# Altium PCB PCB.PcbDoc
Units mm, origin at the board's own origin, x right, y up, seen from the top; angles counter-clockwise.
Board outline 45.34 x 54.67 mm, 2 copper layers (Top Layer, Bottom Layer); 46 components, 49 nets, 176 pads, 748 vias.
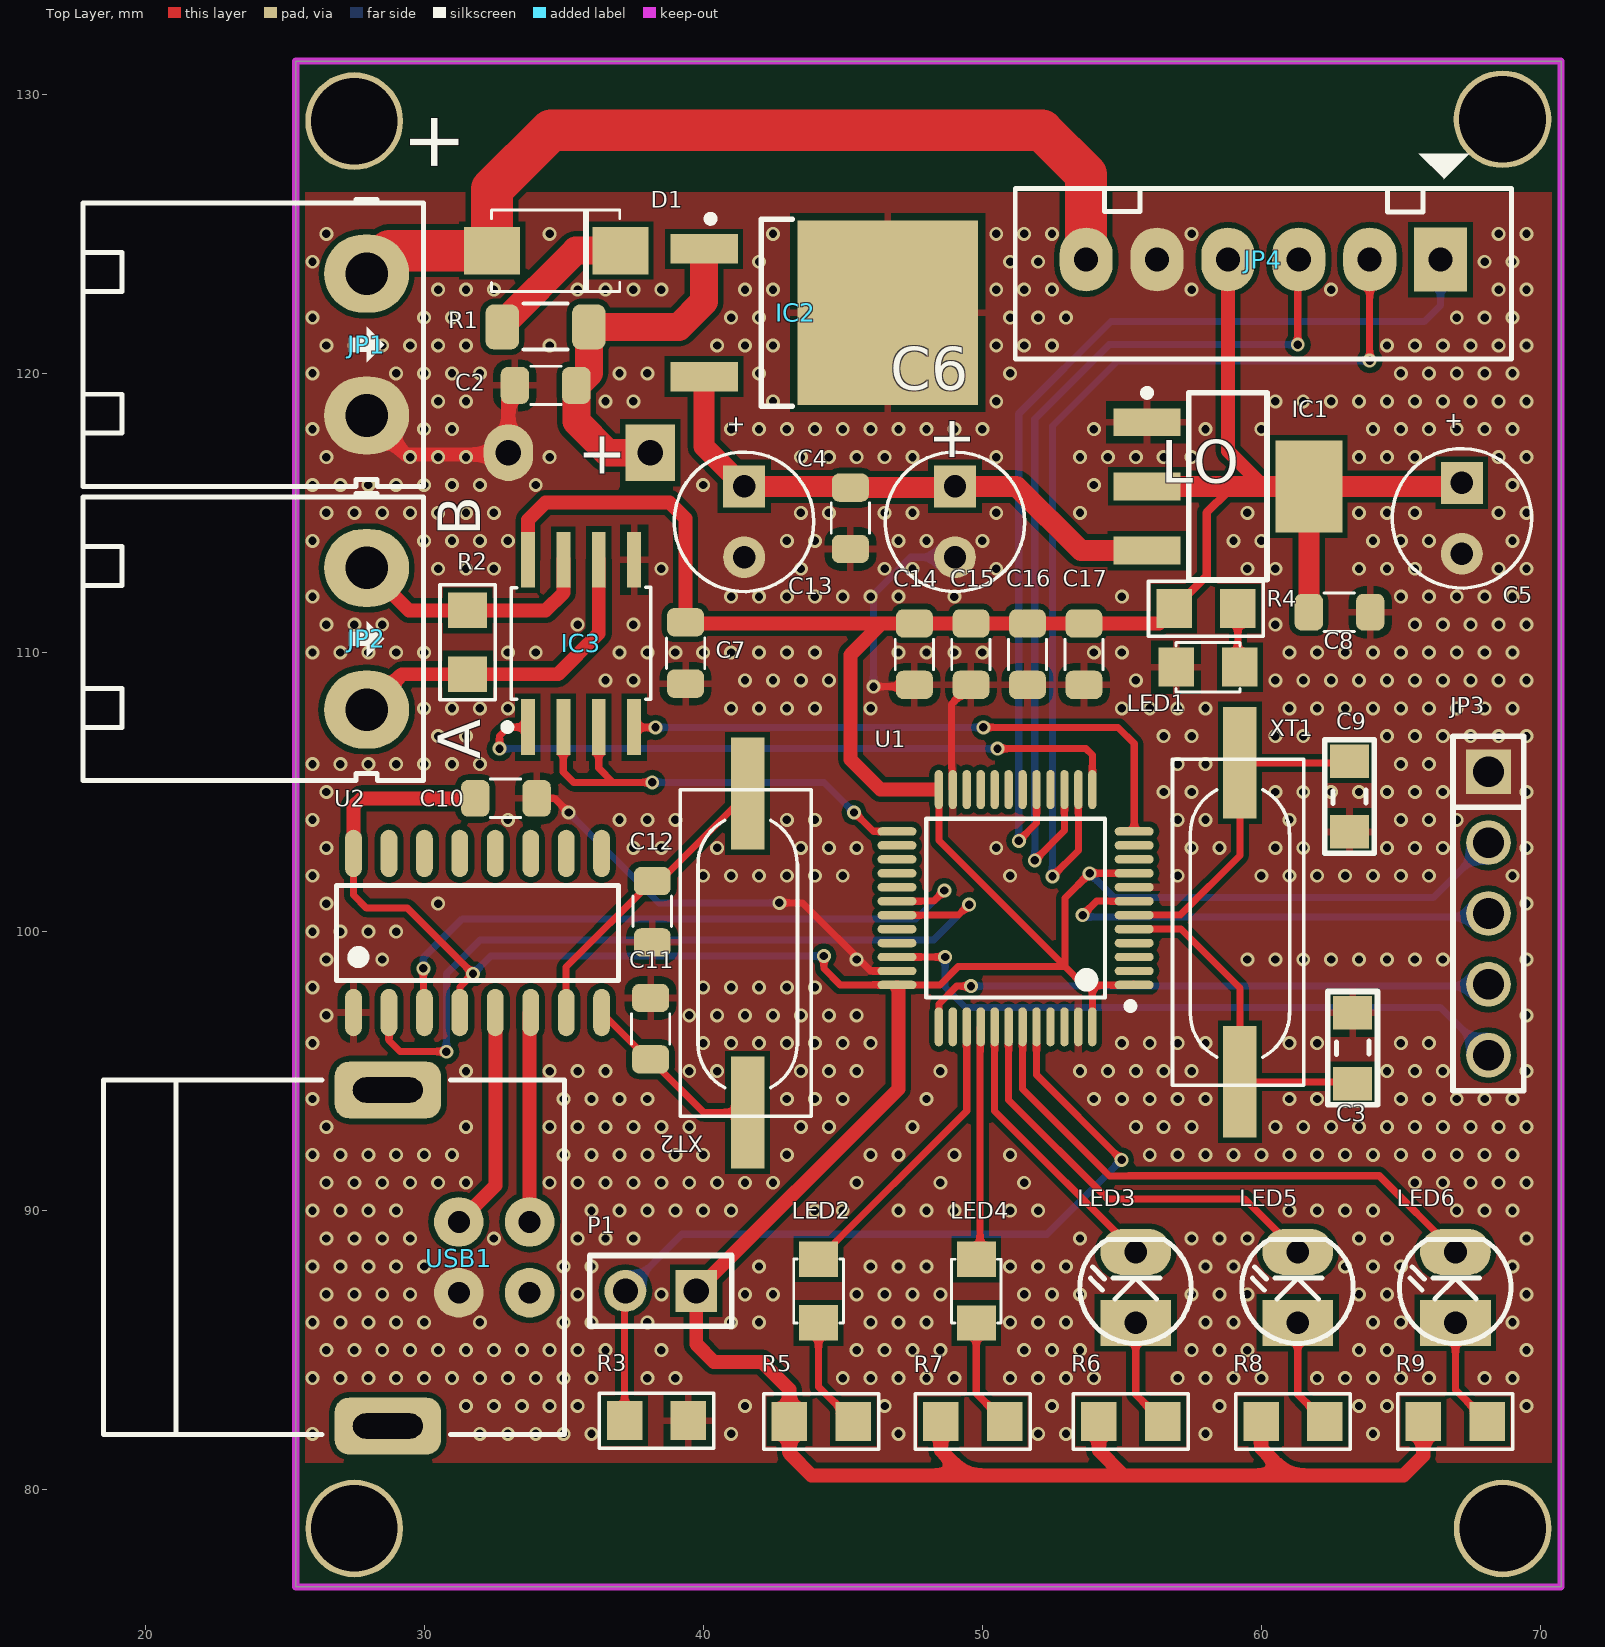
[diagram p0: Top Layer view]
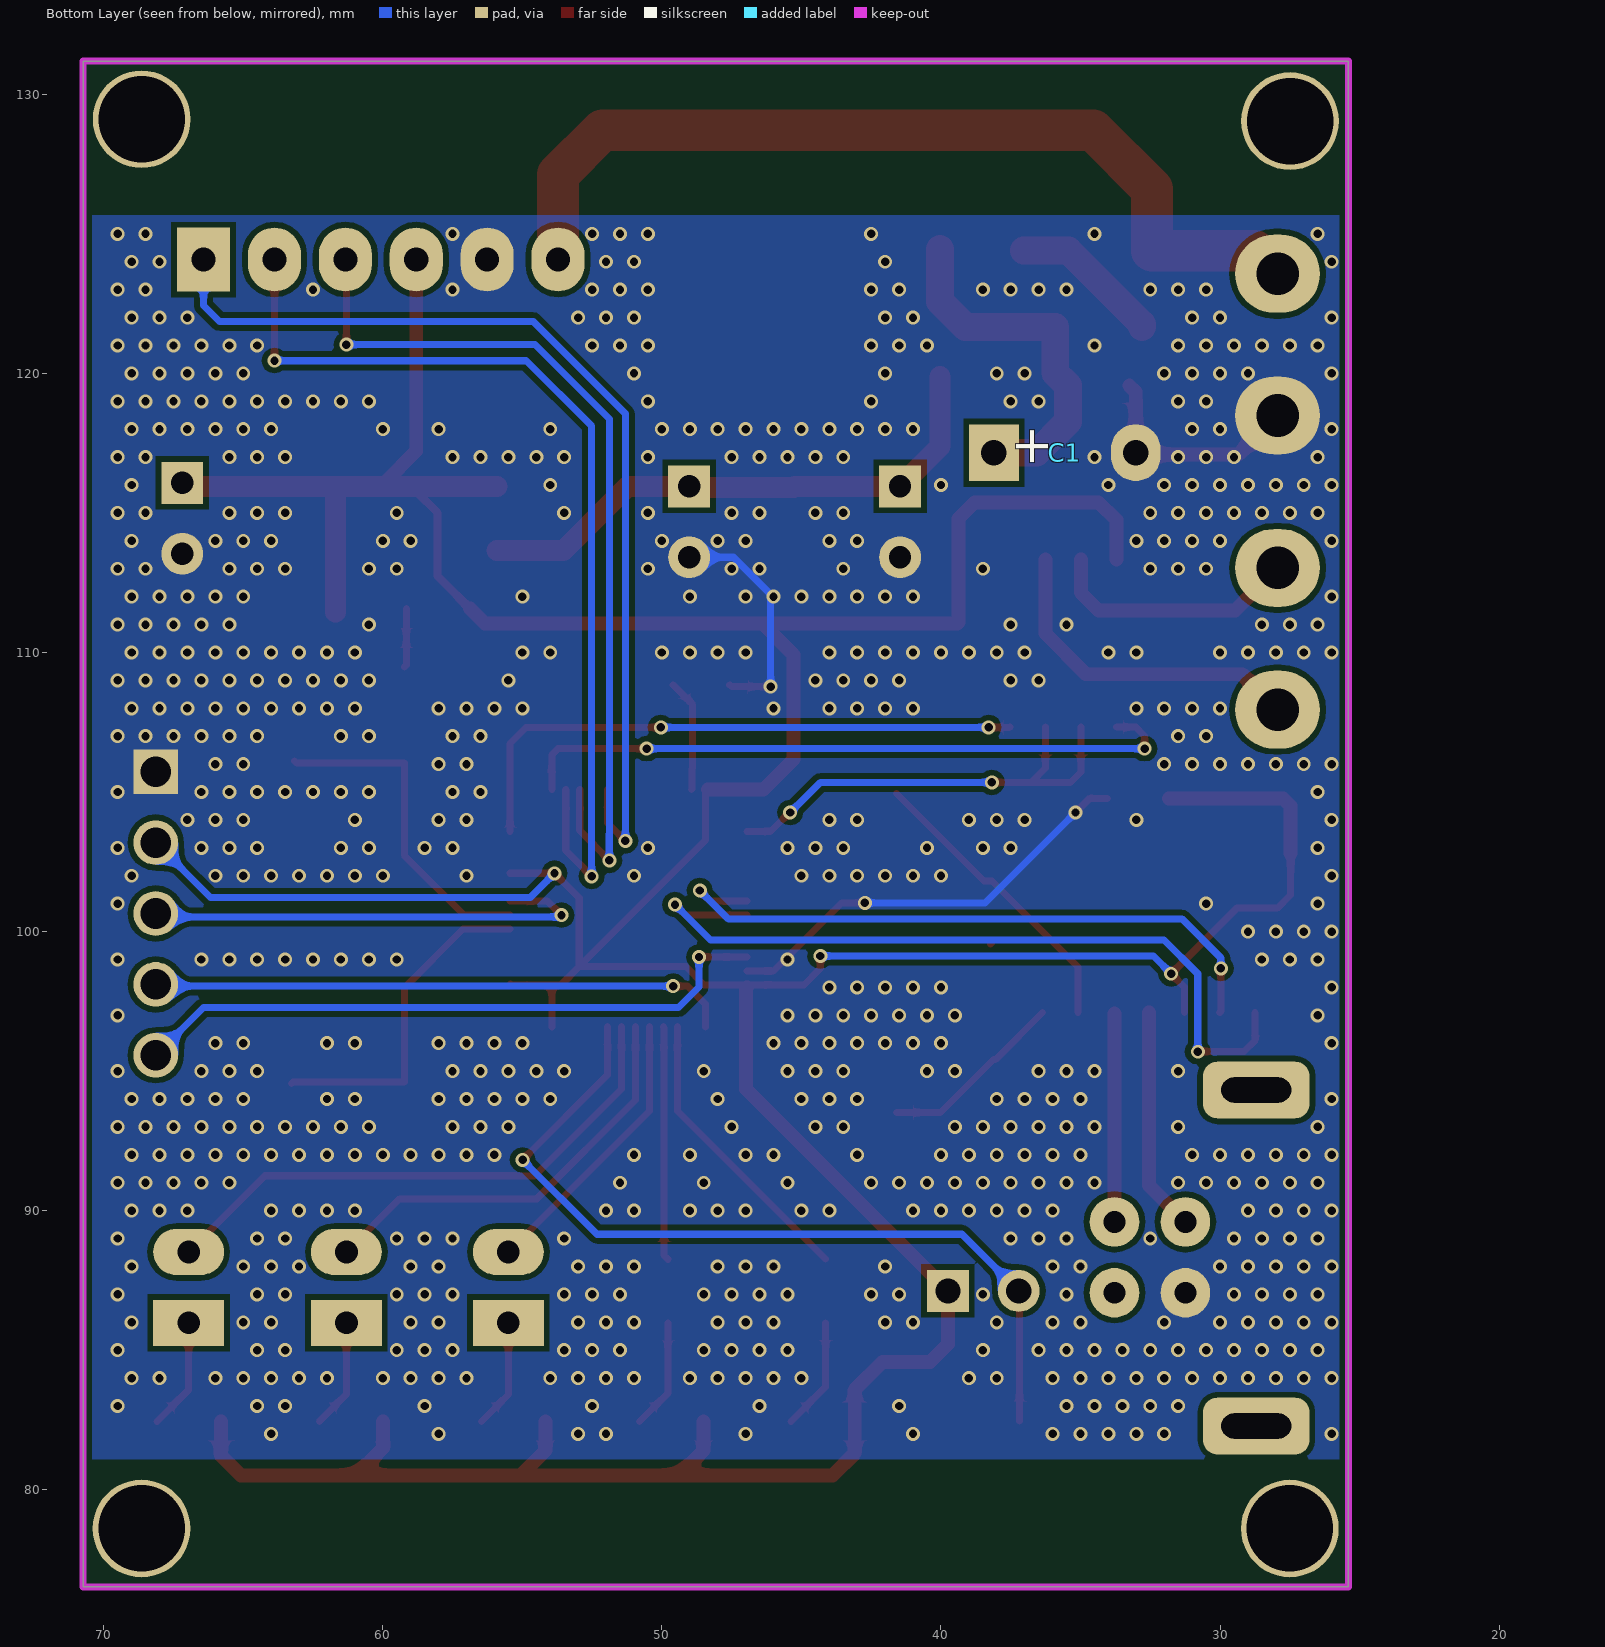
[diagram p1: Bottom Layer view, seen from below]
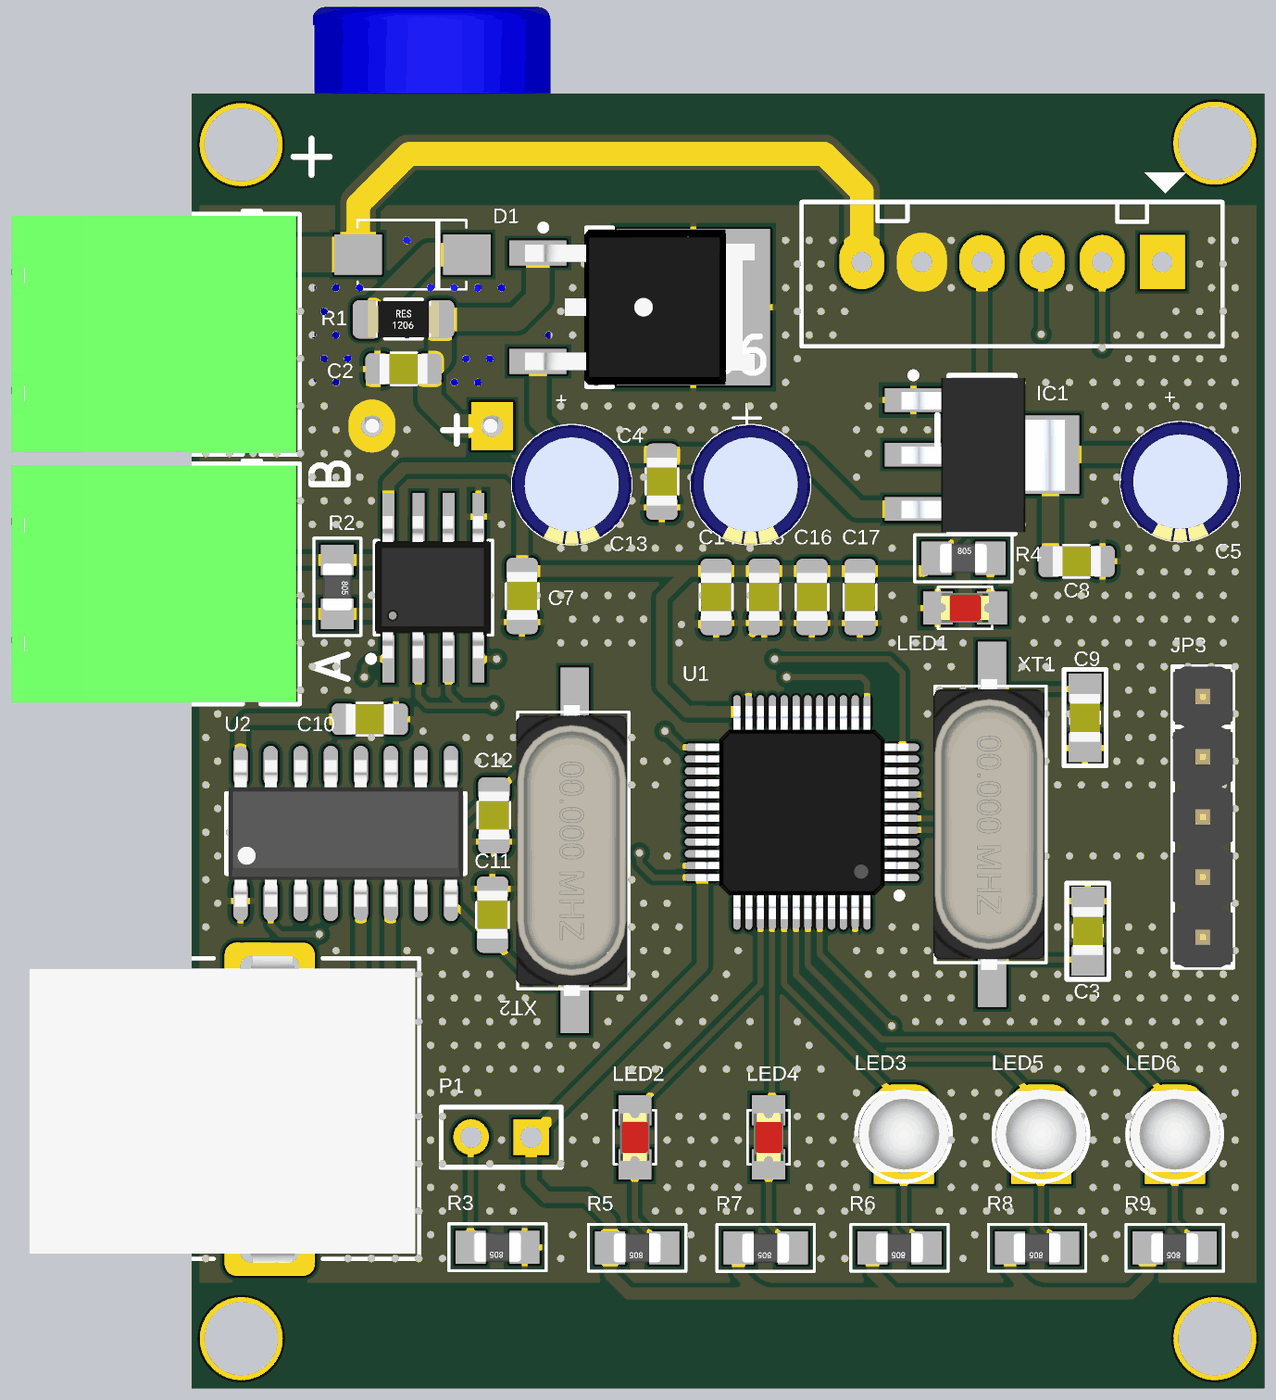
[diagram p2: 3D render of the assembled board from above, using the file's embedded part models]

## Layer stack, top to bottom
Top Solder: solder mask 0.0102, Solder Resist, Dk 3.5
Top Layer: signal copper 0.0356
Dielectric 1: dielectric 0.32, FR-4, Dk 4.8
Bottom Layer: signal copper 0.0356
Bottom Solder: solder mask 0.0102, Solder Resist, Dk 3.5

## Board outline
25.4,76.517 25.4,131.191 70.739,131.191 70.739,76.517

## Design rules (kind name [scope] priority, off if disabled: settings)
Clearance [All] p1: gap=0.2 ignorepadtopadclearanceinfootprint=FALSE
PolygonConnect [All] p1: thpad.connectstyle=Direct thpad.reliefconductorwidth=0.254 thpad.reliefentries=4 thpad.polygonreliefangle="90 Angle" thpad.airgapwidth=0.254 smdpad.connectstyle=Relief smdpad.reliefconductorwidth=0.254 smdpad.reliefentries=4 smdpad.polygonreliefangle="90 Angle" smdpad.airgapwidth=0.254 via.connectstyle=Direct via.reliefconductorwidth=0.254 via.reliefentries=4 via.polygonreliefangle="90 Angle" via.airgapwidth=0.254
RoutingVias [All] p1: holewidth=0.3 width=0.5 viastyle="Through Hole" minholewidth=0.3 minwidth=0.5 maxholewidth=0.3 maxwidth=0.6
SolderMaskExpansion [All] p1: expansion=0.102
Width [All] p1: maxlimit=3 minlimit=0.127 preferedwidth=0.254
30 further rules are at their usual default settings.

## Components (designator, comment, footprint, x,y, rotation, side; value= is the part's Value field where it differs from the comment)
C1 "470uF/25V" "CP_1000UF/25V_NAM - cao" 35.56,117.157 r90 bottom value=470uF
C2 "10uF" C-0805 34.353,119.57 r0 top value=103
C3 "22pF" CAP_0805 63.246,95.822 r90 top value=33p
C4 "10uF" C-0805 45.276,114.808 r90 top value=103
C5 "220uF/16V" CA-ALU-5L 67.183,114.808 r270 top value=100uF/35V/50V
C6 "220uF/16V" CA-ALU-5L 49.022,114.681 r270 top value=100uF/35V/50V
C7 "220uF/16V" CA-ALU-5L 41.465,114.681 r270 top value=100uF/35V/50V
C8 "10uF" C-0805 62.801,111.442 r180 top value=103
C9 "22pF" CAP_0805 63.182,104.838 r270 top value=33p
C10 "100nF" C-0805 32.931,104.775 r180 top
C11 "22pF" C-0805 38.115,96.52 r270 top
C12 "22pF" C-0805 38.175,100.711 r90 top
C13 "100nF" C-0805 39.37,109.982 r270 top
C14 "100nF" C-0805 47.568,109.939 r270 top value=103
C15 "100nF" C-0805 49.594,109.939 r270 top value=103
C16 "100nF" C-0805 51.619,109.939 r270 top value=103
C17 "100nF" C-0805 53.645,109.939 r270 top value=103
D1 "M7" SMA11 34.734,124.396 r0 top value=1N4007
IC1 "LM1117" SOT223-4N 58.801,115.951 r0 top value=LM317
IC2 "LM7805" "TO-252 7805" 43.561,122.174 r0 top
IC3 "MAX3485" SOIC-8 35.622,110.325 r0 top
JP1 "JP2" KF2-5.08T 27.94,123.571 r270 top value="Connector 2"
JP2 "JP2" KF2-5.08T 27.94,113.03 r270 top value="Connector 2"
JP3 "JP5" JP5-D1T 68.135,105.727 r270 top value="Connector 5"
JP4 "JP6" CON6 66.421,124.079 r180 top value="Connector 6"
LED1 "LED" LED-0805-Red 59.229,109.474 r180 top value="LED 3 ly Single Colour"
LED2 "LED" LED-0805-Red 44.133,85.979 r90 top value="LED 3 ly Single Colour"
LED3 "LED" LED-3 55.499,85.979 r90 top value="LED 3 ly Single Colour"
LED4 "LED" LED-0805-Red 49.784,85.974 r90 top value="LED 3 ly Single Colour"
LED5 "LED" LED-3 61.303,85.979 r90 top value="LED 3 ly Single Colour"
LED6 "LED" LED-3 66.954,85.979 r90 top value="LED 3 ly Single Colour"
P1 "Header 2" HDR1X2 39.751,87.122 r180 top
R1 "10R" R-1206 34.353,121.666 r0 top value="R1/4W - 1K"
R2 "120R" R-0805 31.559,110.363 r270 top value="R1/4W - 1K"
R3 "10k" R-0805 38.327,82.474 r180 top value="R1/4W - 1K"
R4 "1K" R-0805 58.014,111.569 r0 top value="R1/4W - 1K"
R5 "1K" R-0805 44.232,82.448 r180 top value="R1/4W - 1K"
R6 "1K" R-0805 55.317,82.448 r180 top value="R1/4W - 1K"
R7 "1K" R-0805 49.657,82.443 r180 top value="R1/4W - 1K"
R8 "1K" R-0805 61.131,82.448 r180 top value="R1/4W - 1K"
R9 "1K" R-0805 66.946,82.448 r180 top value="R1/4W - 1K"
U1 "STM32F103C8T6" LQFP48_L 51.194,100.838 r90 top
U2 "CH340G" SOIC-16 31.915,99.949 r90 top
USB1 "USB-B" USB-B 31.242,88.303 r270 top
XT1 "8Mhz" XTAL-RU49/4 59.229,95.377 r90 top value=12Mhz
XT2 "12Mhz" XTAL-RU49/4 41.593,94.279 r90 top

## Footprints (in the part's own frame and the unit in brackets; to place one, negate y for a bottom-side part, rotate by r counter-clockwise, add the part's x,y. Pads: shape width x height; smd on the part's side, far side on the other; paste and mask are expansions set on the pad)
C-0805 [mil] "Compoment SMD 80x50mil"
  rrect50% 40x52 smd: 1(-43.31,0) 2(43.31,0)
  silkscreen extent -21,-27 22,27, body extent -40,-25 40,25, height 24
CA-ALU-5L [mm] "Polarized capacitors, Aluminum Electrolytic Capacitors, 2-Leads, Body 5x11x2x0.5"
  rect 1.5x1.5 hole 0.8: 1(-1.27,0)
  round 1.5 hole 0.8: 2(1.27,0)
  silkscreen extent -2.5,-2.5 2.5,2.5, body extent -2.54,-2.54 2.54,2.54, height 13.9
CAP_0805 [mm]
  rect 1.2x1.4 smd: 1(-1.27,-0.025) 2(1.27,-0.025)
  silkscreen extent -2.03,-0.91 2.03,0.86, body extent -1.01,-0.66 1.01,0.61, height 0.61
CON6 [mil] "CON6"
  rect 75x90 hole 34: 1(0,0)
  oval 75x90 hole 34: 2(100,0) 3(200,0) 4(300,0) 5(400,0) 6(500,0)
  silkscreen extent -100,-150 600,140
"CP_1000UF/25V_NAM - cao" [mil]
  rect 80x70 hole 36: 1(0,100)
  oval 80x70 hole 36: 2(0,-100)
  body extent -12,-199 697,197, height 458
HDR1X2 [mm] "Connector; Header; 2 Position"
  rect 1.5x1.5 hole 0.9: 1(0,0)
  round 1.5 hole 0.9: 2(2.54,0)
  silkscreen extent -1.27,-1.27 3.81,1.27, body extent -1.27,-1.27 3.81,1.27, height 7
JP5-D1T [mm] "5 pins, 1 row, straight, gold plating"
  rect 1.6x1.6 hole 1.1: 1(0,0)
  round 1.6 hole 1.1: 2(2.54,0) 3(5.08,0) 4(7.62,0) 5(10.16,0)
  silkscreen extent -1.27,-1.27 11.43,1.27, body extent -1.27,-1.27 11.43,1.27, height 8.54
KF2-5.08T [mil] "Header 2, 2 pin, hight 300mil, Pin to Pin 200, Colour Green"
  oval 110x120 hole 60: 1(0,0) 2(200,0)
  silkscreen extent -105,-400 300,80, body extent -97,-399 297,73, height 334
LED-3 [mil] "LED 2 PIN, 3ly Only colour"
  rect 65x100 hole 32: 1(0,0)
  oval 65x100 hole 32: 2(100,0)
  silkscreen extent -29,-78 118,79, body extent -13,-75 125,75, height 217
LED-0805-Red [mil]
  rect 50x55 smd: 1(0,0) 2(90,0)
  silkscreen extent 0,-35 90,35, body extent 5,-25 85,25, height 43
LQFP48_L [mm]
  oval 0.3x1.4 smd: 1(-2.75,-4.25) 2(-2.25,-4.25) 3(-1.75,-4.25) 4(-1.25,-4.25) 5(-0.75,-4.25) 6(-0.25,-4.25) 7(0.25,-4.25) 8(0.75,-4.25) 9(1.25,-4.25) 10(1.75,-4.25) 11(2.25,-4.25) 12(2.75,-4.25) 25(2.75,4.25) 26(2.25,4.25) 27(1.75,4.25) 28(1.25,4.25) 29(0.75,4.25) 30(0.25,4.25) 31(-0.25,4.25) 32(-0.75,4.25) 33(-1.25,4.25) 34(-1.75,4.25) 35(-2.25,4.25) 36(-2.75,4.25)
  oval 1.4x0.3 smd: 13(4.25,-2.75) 14(4.25,-2.25) 15(4.25,-1.75) 16(4.25,-1.25) 17(4.25,-0.75) 18(4.25,-0.25) 19(4.25,0.25) 20(4.25,0.75) 21(4.25,1.25) 22(4.25,1.75) 23(4.25,2.25) 24(4.25,2.75) 37(-4.25,2.75) 38(-4.25,2.25) 39(-4.25,1.75) 40(-4.25,1.25) 41(-4.25,0.75) 42(-4.25,0.25) 43(-4.25,-0.25) 44(-4.25,-0.75) 45(-4.25,-1.25) 46(-4.25,-1.75) 47(-4.25,-2.25) 48(-4.25,-2.75)
  silkscreen extent -3.63,-4.24 3.2,3.2, body extent -4.5,-4.5 4.5,4.5, height 1.5
R-0805 [mil] "Compoment SMD 80x50mil"
  rect 50x55 smd: 1(-45,0) 2(45,0)
  silkscreen extent -81,-39 81,39, body extent -39,-25 39,25, height 31
R-1206 [mm] "Compoment SMD 120x60mil"
  rrect50% 1.2x1.62 smd: 1(-1.55,0) 2(1.55,0)
  silkscreen extent -0.79,-0.81 0.79,0.84, body extent -1.5,-0.77 1.51,0.78, height 0.55
SMA11 [mm] "SMAJ5.0A/CA,SMAJ24CA..."
  rect 2x1.7 smd: 1(-2.3,0) 2(2.3,0)
  silkscreen extent -2.33,-1.46 2.27,1.46, body extent -2.54,-1.46 2.54,1.46, height 2.62
SOIC-8 [mm]
  rect 0.5x2 smd: 1(-1.905,-3) 2(-0.635,-3) 3(0.635,-3) 4(1.905,-3) 5(1.905,3) 6(0.635,3) 7(-0.635,3) 8(-1.905,3)
  silkscreen extent -2.76,-3.12 2.5,2.01, body extent -2.48,-2.97 2.42,3.03, height 1.7
SOIC-16 [mm]
  oval 1.7x0.6 smd: 1(-2.85,4.445) 2(-2.85,3.175) 3(-2.85,1.905) 4(-2.85,0.635) 5(-2.85,-0.635) 6(-2.85,-1.905) 7(-2.85,-3.175) 8(-2.85,-4.445) 9(2.85,-4.445) 10(2.85,-3.175) 11(2.85,-1.905) 12(2.85,-0.635) 13(2.85,0.635) 14(2.85,1.905) 15(2.85,3.175) 16(2.85,4.445)
  silkscreen extent -1.7,-5.05 1.7,5.05, body extent -3.1,-4.95 3.1,4.95, height 1.7
SOT223-4N [mm] "SOT223, 4-Leads, Body 6.5x3.5mm, Pitch 2.3mm, Lead Span 7mm, IPC Medium Density"
  rect 2.4x1 smd: 1(-2.9,2.3) 2(-2.9,0) 3(-2.9,-2.3)
  rect 2.4x3.3 smd: 4(2.9,0)
  silkscreen extent -3.02,-3.35 1.4,3.47, body extent -3.39,-3.27 3.5,3.23, height 1.72
"TO-252 7805" [mil]
  rect 95x41.34 smd: 1(-138.92,90.16) 3(-138.92,-90.16)
  rect 255x260 smd: 2(120,0)
  silkscreen extent -135,-132 -15,137, body extent -160,-130 221,130, height 91
USB-B [mil]
  rrect50% 80x150 hole 35.43 slot 98.43 at 90 deg: 0(-237.01,-100) 0(237.01,-100)
  round 70 hole 31: 1(49,100) 2(-51,100) 3(-51,0) 4(49,0)
  silkscreen extent -251,-501 249,149, body extent -290,-500 296,142, height 447
XTAL-RU49/4 [mm]
  rect 4x1.2 smd: 1(-0.762,0) 2(10.668,0)
  silkscreen extent -0.89,-2.29 10.8,2.41, body extent -1.2,-2.22 11.1,2.48, height 4.3

## Part data
C1: library part CP4, "470uF/35V", Manufacturer="Würth Elektronik", Part number=860020575014, Category=CAPACITOR, User_Description="CAP ALUM 470UF 20% 35V RADIAL"
C2 C4 C8 C14 C15 C16 C17: library part C, "Cap SMD"
C3 C9: library part CapSMD, "Capacitor", LatestRevisionDate=17-Jul-2002, LatestRevisionNote="Re-released for DXP Platform.", PackageReference=RAD-0.3, Published=8-Jun-2000, Publisher="Altium Limited"
C5 C6 C7: library part CP3, "Cap 100uF/35V - 470uF/16V", Description 1="1000uF/6,3V - 470uF/16V - 330uF - 25V", Description 2="220uF/35V - 100uF/50V - 63V - 4,7uF/200V", Description 3="22uF => 33uF100V - 3,3uF => 4,7uF/250V", Description 4="2,2uF =>3,3uF/350 - 2,2uF/400V - 1uF/450V"
C10 C13: library part C, "Cap SMD", Manufacturer="Samsung Electro-Mechanics", Package=0805, Part number=CL21B104KBCNNWC, Category=CAPACITOR, User_Description="CAP CER 0.1UF 50V X7R 0805"
C11 C12: library part C, "Cap SMD", Manufacturer="Samsung Electro-Mechanics", Package=0805, Part number=CL21C220JBANFNC, Category=CAPACITOR, User_Description="CAP CER 22PF 50V C0G/NP0 0805"
D1: library part D1A, "Diode 1A"
IC1: "3v3"
IC2: library part LM78xx, "On ap +, from + 5 to + 24VDC"
IC3: library part MAX3362EKA+T, "IC TRANSCEIVER HALF 1/1 SOT23-8", Manufacturer="Maxim Integrated", Package=SOT-23-8, Category="Interface - Drivers", Part number=MAX3362EKA+T, User_Description="IC TRANSCEIVER HALF 1/1 SOT23-8"
JP1 JP2: library part Con2, "Connector 2"
JP3: library part Con5, "Connector 5"
JP4: library part Con6, "Connector 6"
LED1 LED2 LED3 LED4 LED5 LED6: "LED Single colour Green and Red"
P1: "Header, 2-Pin", LatestRevisionDate=17-Jul-2002, LatestRevisionNote="Re-released for DXP Platform.", Publisher="Altium Limited"
R1 R2 R3 R4 R5 R6 R7 R8 R9: library part RES, "Resistor 1/4W"
U2: "USB to UART Interface", Manufacturer=WCH, Package=SOIC-16, Category="IC UART Interface", Part number=CH340G, User_Description="USB to UART Interface"
USB1: "CONN USB 2.0 RT ANGLE TYPE B", Manufacturer="Stewart Connector", Package="Through Hole", Part number=SS-52300-001, Category="Connectors, Interconnects", User_Description="CONN USB 2.0 RT ANGLE TYPE B"
XT1 XT2: library part XT2, "CRYSTAL 12.0000MHZ 18PF SMD", Manufacturer="IQD Frequency Products", Package=HC-49/US, Part number=LFXTAL036356REEL, Category=Crystals, User_Description="CRYSTAL 12.0000MHZ 18PF SMD"

## Free pads (board coordinates)
  round 3.5 hole 3.1: 2(27.492,129.041) 3(68.64,129.105) 4(27.497,78.613) 5(68.645,78.613)

## Via types
v1: diameter 0.5, hole 0.3, Top Layer to Bottom Layer, tented both sides, 748 vias

## Nets (pads, with @x,y where several pads share a name; then routed paths per layer and width w, separated by ;. In a path a pad name is that pad's centre, name@x,y a point inside that pad or via, vN(x,y) a via of type N, cw(c..) or ccw(c..) an arc to the next point about the centre after c; other vN are vias at no path point)
5V: USB1.1
485A: IC3.6 JP2.2 R2.2 | length 12.1
  Top Layer w0.5: JP2.2 29.21,109.22 R2.2 34.798,109.22 36.257,110.679 IC3.6
485B: IC3.7 JP2.1 R2.1 | length 9.1
  Top Layer w0.5: JP2.1 29.464,111.506 R2.1 34.353,111.506 34.987,112.14 IC3.7
+3.3V: C5.1 C8.2 C10.2 C13.1 C14.1 C15.1 C16.1 C17.1 IC1.2 IC1.4 IC3.8 JP3.2 JP4.4 P1.1 R4.1 R5.2 R6.2 R7.2 R8.2 R9.2 U1.1 U1.9 U1.24 U1.36 U1.48 U2.4 U2.16 | length 191.4
  Top Layer w0.254: U2.16 27.47,101.308 27.94,100.838 29.4,100.838 v1(31.75,98.489) 31.28,98.019 U2.4 ; v1(44.323,99.123) 44.323,98.675 44.91,98.088 U1.36 48.485,98.088 49.14,98.742 52.959,98.742 ; U1.24 48.444,103.258 52.959,98.742 ; U1.48 53.944,98.079 ; U1.1 55.421,98.111 55.388,98.079 53.944,98.079 ; U1.9 v1(53.848,102.088) 52.959,101.199 52.959,98.742 ; 52.959,98.742 53.623,98.079 53.944,98.079
  Top Layer w0.3: R4.1 58.039,112.738 58.039,115.008 58.801,115.77 58.801,115.951
  Top Layer w0.5: U2.16 27.47,104.496 27.749,104.775 C10.2 ; IC3.8 33.717,114.743 34.353,115.379 38.798,115.379 39.37,114.808 C13.1 39.413,111.039 46.396,111.039 ; U1.36@46.944,97.988 46.99,97.942 46.99,94.361 P1.1 39.751,85.217 40.386,84.582 42.1,84.582 43.089,83.594 R5.2 43.089,81.308 43.878,80.518 49.403,80.518 ; U1.24@48.344,105.088 47.095,105.088 47.089,105.094 46.51,105.094 46.504,105.088 46.355,105.088 45.276,106.167 45.276,109.918 46.396,111.039 ; R7.2 48.514,81.407 49.403,80.518 ; R6.2 54.174,81.399 54.991,80.581 54.991,80.518 ; R4.1 56.34,111.039 C17.1 C16.1 C15.1 C14.1 46.396,111.039 ; JP4.4 58.801,117.221 59.944,116.078 59.944,115.951 ; R8.2 59.988,81.49 60.96,80.518 ; R9.2 65.803,81.233 65.087,80.518 60.96,80.518 ; 49.403,80.518 54.991,80.518 ; 54.991,80.518 60.96,80.518
  Top Layer w0.75: IC1.2 58.801,115.951 59.944,115.951 IC1.4 ; C8.2 IC1.4 ; C5.1 67.056,115.951 IC1.4
  Bottom Layer w0.254: v1(31.75,98.489) 32.385,99.123 v1(44.323,99.123) ; v1(53.848,102.088) 54.717,101.219 66.167,101.219 JP3.2
+5V: C4.2 C6.1 C7.1 IC1.3 IC2.3 | length 20
  Top Layer w0.75: IC2.3 40.032,117.384 C7.1 45.233,115.951 C4.2 48.979,115.908 C6.1 51.23,115.951 53.53,113.651 IC1.3
+12: D1.1 JP1.1 JP4.6 | length 32.9
  Top Layer w1.5: JP1.1 28.765,124.396 D1.1 32.434,126.605 34.544,128.714 52.133,128.714 53.721,127.127 JP4.6
BOOT0: P1.2 R3.2 U1.44 | length 30.4
  Top Layer w0.254: R3.2 P1.2@37.184,87.095 ; U1.44 51.944,94.868 v1(54.991,91.821)
  Top Layer w0.5: P1.2@37.184,87.095 P1.2
  Bottom Layer w0.254: P1.2 39.243,89.154 52.324,89.154 v1(54.991,91.821)
D+: U2.5 USB1.3 | length 8
  Top Layer w0.5: USB1.3 32.55,90.907 U2.5
D-: U2.6 USB1.2 | length 7.5
  Top Layer w0.4: U2.6@33.782,97.061 U2.6
  Top Layer w0.5: USB1.2 U2.6@33.782,97.061
DE/RE: IC3.2 IC3.3 U1.25 | length 16.6
  Top Layer w0.254: IC3.2 34.987,105.719 35.359,105.346 36.767,105.346 ; IC3.3 36.257,105.856 36.767,105.346 ; v1(38.175,105.346) 36.767,105.346 ; v1(45.402,104.267) 45.427,104.267 46.106,103.588 U1.25
  Bottom Layer w0.254: v1(38.175,105.346) 44.323,105.346 v1(45.402,104.267)
GND: C1.2 C2.1 C3.2 C4.1 C5.2 C6.2 C7.2 C8.1 C9.2 C10.1 C11.1 C12.1 C13.2 C14.2 C15.2 C16.2 C17.2 IC1.1 IC2.2 IC3.5 JP1.2 JP3.1 JP4.5 LED1.2 R3.1 U1.8 U1.23 U1.35 U1.47 U2.1 USB1.4 | length 36.1
  Top Layer w0.254: C10.1 34.671,104.775 v1(35.179,104.267) ; C12.1 C12.1@38.227,99.559 ; v1(42.728,101.028) 43.561,101.028 46.002,98.588 U1.35 ; v1(46.101,108.775) 47.504,108.775 C14.2 ; U1.23 48.921,105.111 48.921,105.836 48.895,105.861 48.895,108.14 C15.2
  Top Layer w0.5: JP1.2 29.337,117.094 32.956,117.094 C1.2 33.02,119.337 C2.1
  Bottom Layer w0.254: v1(35.179,104.267) 38.417,101.028 v1(42.728,101.028) ; v1(46.101,108.775) 46.101,112.078 47.434,113.411 C6.2
  other v1: 26,82 32,82 33,82 34,82 35,82 36,82 41,82 47,82 52,82 53,82 58,82 64,82 31.5,83 32.5,83 33.5,83 34.5,83 35.5,83 41.5,83 46.5,83 52.5,83 58.5,83 63.5,83 64.5,83 69.5,83 26,84 27,84 28,84 29,84 30,84 31,84 32,84 33,84 34,84 35,84 36,84 38,84 39,84 45,84 46,84 47,84 48,84 49,84 51,84 52,84 53,84 54,84 57,84 58,84 59,84 60,84 62,84 63,84 64,84 65,84 66,84 68,84 69,84 26.5,85 27.5,85 28.5,85 29.5,85 30.5,85 31.5,85 32.5,85 33.5,85 34.5,85 35.5,85 36.5,85 38.5,85 45.5,85 46.5,85 47.5,85 48.5,85 51.5,85 52.5,85 53.5,85 57.5,85 58.5,85 59.5,85 63.5,85 64.5,85 69.5,85 26,86 27,86 28,86 29,86 30,86 32,86 35,86 36,86 38,86 41,86 42,86 46,86 47,86 48,86 51,86 52,86 53,86 58,86 59,86 64,86 65,86 69,86 26.5,87 27.5,87 28.5,87 29.5,87 35.5,87 38.5,87 41.5,87 42.5,87 45.5,87 46.5,87 47.5,87 48.5,87 51.5,87 52.5,87 53.5,87 57.5,87 58.5,87 59.5,87 63.5,87 64.5,87 69.5,87 26,88 27,88 28,88 29,88 30,88 35,88 36,88 42,88 46,88 47,88 48,88 51,88 52,88 53,88 58,88 59,88 63,88 64,88 65,88 69,88 26.5,89 27.5,89 28.5,89 29.5,89 32.5,89 35.5,89 36.5,89 37.5,89 53.5,89 57.5,89 58.5,89 59.5,89 63.5,89 64.5,89 69.5,89 26,90 27,90 28,90 29,90 36,90 37,90 38,90 39,90 40,90 41,90 44,90 45,90 47,90 48,90 49,90 51,90 52,90 61,90 62,90 63,90 64,90 67,90 68,90 69,90 26.5,91 27.5,91 28.5,91 29.5,91 30.5,91 31.5,91 34.5,91 35.5,91 36.5,91 37.5,91 38.5,91 39.5,91 40.5,91 41.5,91 42.5,91 45.5,91 48.5,91 51.5,91 65.5,91 66.5,91 67.5,91 68.5,91 69.5,91 26,92 27,92 28,92 29,92 30,92 31,92 35,92 36,92 37,92 38,92 39,92 40,92 43,92 46,92 47,92 49,92 51,92 56,92 57,92 58,92 59,92 60,92 61,92 62,92 63,92 64,92 65,92 66,92 67,92 68,92 69,92 26.5,93 31.5,93 34.5,93 35.5,93 36.5,93 37.5,93 38.5,93 39.5,93 43.5,93 44.5,93 47.5,93 55.5,93 56.5,93 57.5,93 60.5,93 61.5,93 62.5,93 63.5,93 64.5,93 65.5,93 66.5,93 67.5,93 68.5,93 69.5,93 26,94 35,94 36,94 37,94 38,94 43,94 44,94 45,94 48,94 54,94 55,94 56,94 57,94 58,94 61,94 62,94 65,94 66,94 67,94 68,94 69,94 31.5,95 34.5,95 35.5,95 36.5,95 39.5,95 40.5,95 43.5,95 44.5,95 45.5,95 48.5,95 53.5,95 54.5,95 55.5,95 56.5,95 57.5,95 64.5,95 65.5,95 66.5,95 69.5,95 26,96 40,96 41,96 42,96 43,96 44,96 45,96 46,96 55,96 56,96 57,96 58,96 61,96 62,96 65,96 66,96 26.5,97 39.5,97 40.5,97 41.5,97 42.5,97 43.5,97 44.5,97 45.5,97 69.5,97 26,98 40,98 41,98 42,98 43,98 44,98 26.5,99 27.5,99 28.5,99 45.5,99 59.5,99 60.5,99 61.5,99 62.5,99 63.5,99 64.5,99 65.5,99 66.5,99 69.5,99 26,100 27,100 28,100 29,100 26.5,101 30.5,101 69.5,101 26,102 40,102 41,102 42,102 43,102 44,102 45,102 51,102 57,102 60,102 61,102 62,102 63,102 64,102 65,102 66,102 69,102 26.5,103 37.5,103 38.5,103 40.5,103 43.5,103 44.5,103 45.5,103 50.5,103 57.5,103 58.5,103 60.5,103 61.5,103 64.5,103 65.5,103 66.5,103 69.5,103 26,104 33,104 37,104 38,104 39,104 43,104 44,104 57,104 58,104 61,104 65,104 66,104 67,104 26.5,105 56.5,105 57.5,105 60.5,105 61.5,105 62.5,105 63.5,105 64.5,105 65.5,105 66.5,105 69.5,105 26,106 27,106 28,106 29,106 30,106 31,106 32,106 57,106 58,106 65,106 66,106 30.5,107 31.5,107 56.5,107 57.5,107 60.5,107 61.5,107 64.5,107 65.5,107 66.5,107 67.5,107 68.5,107 69.5,107 30,108 31,108 32,108 33,108 41,108 42,108 43,108 44,108 46,108 55,108 56,108 57,108 58,108 61,108 62,108 63,108 64,108 65,108 66,108 67,108 68,108 69,108 36.5,109 37.5,109 41.5,109 42.5,109 43.5,109 44.5,109 55.5,109 60.5,109 61.5,109 62.5,109 63.5,109 64.5,109 65.5,109 66.5,109 67.5,109 68.5,109 69.5,109 26,110 27,110 28,110 29,110 30,110 33,110 34,110 37,110 38,110 39,110 40,110 41,110 42,110 43,110 44,110 47,110 48,110 49,110 50,110 54,110 55,110 61,110 62,110 63,110 64,110 65,110 66,110 67,110 68,110 69,110 26.5,111 27.5,111 28.5,111 35.5,111 37.5,111 60.5,111 65.5,111 66.5,111 67.5,111 68.5,111 69.5,111 26,112 41,112 42,112 43,112 44,112 45,112 46,112 47,112 49,112 55,112 65,112 66,112 67,112 68,112 69,112 30.5,113 31.5,113 32.5,113 38.5,113 43.5,113 46.5,113 47.5,113 50.5,113 59.5,113 60.5,113 63.5,113 64.5,113 65.5,113 68.5,113 69.5,113 26,114 30,114 31,114 32,114 33,114 43,114 44,114 47,114 48,114 50,114 59,114 60,114 64,114 65,114 66,114 69,114 26.5,115 27.5,115 28.5,115 29.5,115 30.5,115 31.5,115 32.5,115 43.5,115 44.5,115 46.5,115 47.5,115 50.5,115 53.5,115 59.5,115 63.5,115 64.5,115 65.5,115 68.5,115 69.5,115 26,116 27,116 28,116 29,116 30,116 31,116 32,116 34,116 40,116 54,116 69,116 26.5,117 29.5,117 30.5,117 31.5,117 34.5,117 43.5,117 44.5,117 45.5,117 46.5,117 47.5,117 50.5,117 53.5,117 54.5,117 55.5,117 56.5,117 57.5,117 63.5,117 64.5,117 65.5,117 68.5,117 69.5,117 26,118 30,118 31,118 41,118 42,118 43,118 44,118 45,118 46,118 47,118 48,118 49,118 50,118 54,118 58,118 60,118 64,118 65,118 66,118 67,118 68,118 69,118 30.5,119 31.5,119 36.5,119 37.5,119 42.5,119 50.5,119 60.5,119 61.5,119 62.5,119 63.5,119 64.5,119 65.5,119 66.5,119 67.5,119 68.5,119 69.5,119 26,120 29,120 30,120 31,120 32,120 37,120 38,120 42,120 51,120 65,120 66,120 67,120 68,120 69,120 26.5,121 27.5,121 28.5,121 29.5,121 30.5,121 31.5,121 34.5,121 40.5,121 41.5,121 42.5,121 50.5,121 51.5,121 52.5,121 64.5,121 65.5,121 66.5,121 67.5,121 68.5,121 69.5,121 26,122 30,122 31,122 41,122 42,122 51,122 52,122 53,122 67,122 68,122 69,122 30.5,123 31.5,123 32.5,123 35.5,123 36.5,123 37.5,123 38.5,123 41.5,123 42.5,123 50.5,123 51.5,123 52.5,123 57.5,123 62.5,123 68.5,123 69.5,123 26,124 42,124 51,124 52,124 68,124 69,124 26.5,125 34.5,125 42.5,125 50.5,125 51.5,125 52.5,125 57.5,125 68.5,125 69.5,125
I2C_SCL: U1.21
I2C_SDA: U1.22
IN1: U1.18
IN2: U1.19
IN3: U1.20
IN9: U1.45
IN10: U1.46
IN12: U1.26
IN13: U1.27
IN14: U1.28
LED1: LED2.2 U1.39 | length 10.5
  Top Layer w0.254: LED2.2 49.444,93.576 U1.39
LED2: LED4.2 U1.40 | length 8.4
  Top Layer w0.254: LED4.2 49.921,88.397 49.921,96.565 U1.40
LED3: LED3.2 U1.41 | length 10.2
  Top Layer w0.254: U1.41 50.444,93.574 LED3.2
LED4: LED5.2 U1.42 | length 15.2
  Top Layer w0.254: U1.42 50.944,93.963 54.483,90.424 59.398,90.424 LED5.2
LED5: LED6.2 U1.43 | length 20.2
  Top Layer w0.254: U1.43 51.444,94.361 54.561,91.244 55.23,91.244 55.235,91.249 64.224,91.249 LED6.2
MCU_XTAL1: C3.1 U1.5 XT1.1 | length 12.1
  Top Layer w0.254: U1.5 57.121,100.088 59.229,97.98 XT1.1 63.208,94.615 C3.1
MCU_XTAL2: C9.1 U1.6 XT1.2 | length 11.9
  Top Layer w0.254: U1.6 57.092,100.588 59.229,102.725 XT1.2 63.094,106.045 C9.1
NetC1_1: C1.1 C2.2 IC2.1 R1.2 | length 13.1
  Top Layer w1: C1.1 36.567,117.157 35.454,118.271 C2.2 35.903,120.02 R1.2 39.123,121.666 40.032,122.575 IC2.1
NetC11_2: C11.2 U2.8 XT2.1 | length 6.7
  Top Layer w0.254: U2.8 38.039,95.42 C11.2 40.018,93.517 XT2.1
NetC12_2: C12.2 U2.7 XT2.2 | length 10.7
  Top Layer w0.254: U2.7 35.09,98.726 C12.2 38.456,101.811 XT2.2
NetD1_2: D1.2 R1.1 | length 5.4
  Top Layer w1: R1.1 32.804,121.767 35.433,124.396 D1.2
NetLED1_1: LED1.1 R4.2 | length 2.1
  Top Layer w0.254: R4.2 59.157,109.546 LED1.1
NetLED2_1: LED2.1 R5.1 | length 4
  Top Layer w0.254: LED2.1 44.133,83.691 R5.1
NetLED3_1: LED3.1 R6.1 | length 3.9
  Top Layer w0.254: LED3.1 55.499,83.409 R6.1
NetLED4_1: LED4.1 R7.1 | length 4
  Top Layer w0.254: LED4.1 49.784,83.459 R7.1
NetLED5_1: LED5.1 R8.1 | length 3.9
  Top Layer w0.254: LED5.1 61.303,83.42 R8.1
NetLED6_1: LED6.1 R9.1 | length 4
  Top Layer w0.254: LED6.1 66.954,83.583 R9.1
RST: JP3.3 U1.7 | length 16.7
  Top Layer w0.254: v1(53.598,100.588) 54.098,101.088 U1.7
  Bottom Layer w0.254: v1@53.594,100.584 v1(53.598,100.588) 53.666,100.52 68.008,100.52 JP3.3
SPI1_MISO: U1.16
SPI1_MOSI: JP4.1 U1.17 | length 35.8
  Top Layer w0.254: v1(51.308,103.251) 51.944,103.887 U1.17
  Bottom Layer w0.254: v1(51.308,103.251) 51.308,118.554 54.61,121.856 65.849,121.856 66.421,122.428 JP4.1
SPI1_NSS: JP4.2 U1.14 | length 35.6
  Top Layer w0.254: v1(52.514,101.981) 53.444,102.91 U1.14 ; v1(63.881,120.459) JP4.2
  Bottom Layer w0.254: v1(52.514,101.981) 52.514,118.11 54.864,120.459 54.869,120.454 63.876,120.454 v1(63.881,120.459)
SPI1_SCK: JP4.3 U1.15 | length 32.4
  Top Layer w0.254: v1(51.88,102.552) 52.944,103.617 U1.15 ; v1(61.303,121.031) 61.303,124.041 JP4.3
  Bottom Layer w0.254: v1(51.88,102.552) 51.885,102.558 51.885,103.49 51.88,103.495 51.88,118.364 54.546,121.031 v1(61.303,121.031)
SWCLK: JP3.4 U1.37 | length 21
  Top Layer w0.254: U1.37 48.444,97.402 49.085,98.044 v1(49.593,98.044) ; JP3.4@68.008,98.044 JP3.4@68.135,98.171
  Bottom Layer w0.254: v1(49.593,98.044) 68.072,98.044 JP3.4
SWDIO: JP3.5 U1.34 | length 23.3
  Top Layer w0.254: U1.34 v1(48.669,99.088)
  Bottom Layer w0.254: v1(48.669,99.088) 48.669,98.016 49.403,97.282 66.421,97.282 JP3.5
UART1_RX: U1.31 U2.2 | length 28.5
  Top Layer w0.254: U2.2 28.74,96.101 29.137,95.704 30.788,95.704 v1(30.797,95.694) ; U1.31 49.153,100.588 v1(49.53,100.965)
  Bottom Layer w0.254: v1(30.797,95.694) 30.797,98.489 32.009,99.7 45.26,99.7 45.266,99.695 48.26,99.695 v1(49.53,100.965)
UART1_TX: U1.30 U2.3 | length 23.5
  Top Layer w0.254: v1(29.972,98.679) 29.972,97.137 U2.3 ; U1.30 48.256,101.088 v1(48.641,101.473)
  Bottom Layer w0.254: v1(29.972,98.679) 29.972,99.06 31.369,100.457 42.484,100.457 42.489,100.452 47.62,100.452 v1(48.641,101.473)
UART2_RX: IC3.1 U1.13 | length 24.2
  Top Layer w0.254: v1(32.703,106.553) 32.703,107.007 33.02,107.325 IC3.1 ; v1(50.546,106.553) 53.721,106.553 53.944,106.33 U1.13
  Bottom Layer w0.254: v1(32.703,106.553) v1(50.546,106.553)
UART2_TX: IC3.4 U1.12 | length 21.3
  Top Layer w0.254: IC3.4 37.537,107.315 v1(38.291,107.315) ; v1(50.038,107.315) 54.864,107.315 55.444,106.735 U1.12
  Bottom Layer w0.254: v1(38.291,107.315) v1(50.038,107.315)
pads on no net: U1.2 U1.3 U1.4 U1.10 U1.11 U1.29 U1.32 U1.33 U1.38 U2.9 U2.10 U2.11 U2.12 U2.13 U2.14 U2.15 USB1.0

## Polygon pours and split planes (outlines as drawn)
GND on Bottom Layer "BOT_GND" (solid, remove dead copper, pour order 4): 70.739,125.666 70.739,81.09 25.4,81.09 25.4,125.666
GND on Top Layer "TOP_GND" (solid, remove dead copper, pour order 2): 25.4,126.492 70.739,126.492 70.739,80.962 25.4,80.962

## Keep-outs
Keep-Out Layer:
  the board outline again, w0.254

## Silkscreen, mask and mechanical layers (free items; w line width, h text height)
Top Overlay:
  text "+" at 31.242,127.127 h2 r90
  text "+" at 35.496,116.395 h1.52
  text "LO" at 56.388,116.078 h1.52
  text "B" at 32.004,114.173 h1.52 r90
  text "A" at 32.004,106.172 h1.52 r90
Top Solder:
  lines w1: 32.434,124.396 32.434,126.498 34.587,128.651 52.133,128.651 53.721,127.063 53.721,124.079

## Text inside footprints (layer, text, board x,y; h text height)
C1: Bottom Overlay "+" at 35.712,116.624 h2.29 r270
C5: Top Overlay "+" at 66.446,118.633 h1 r270
C6: Top Overlay "+" at 48.285,118.506 h1.5 r270
C7: Top Overlay "+" at 40.729,118.506 h1 r270